# Altium PCB 3043-1-1532.PcbDoc (part 2 of 2)
Units mm, origin at the board's own origin, x right, y up, seen from the top; angles counter-clockwise.
Board outline 82.5 x 82.18 mm, 4 copper layers (Top Layer, Mid-Layer 1, Mid-Layer 2, Bottom Layer); 178 components, 120 nets, 547 pads, 246 vias.
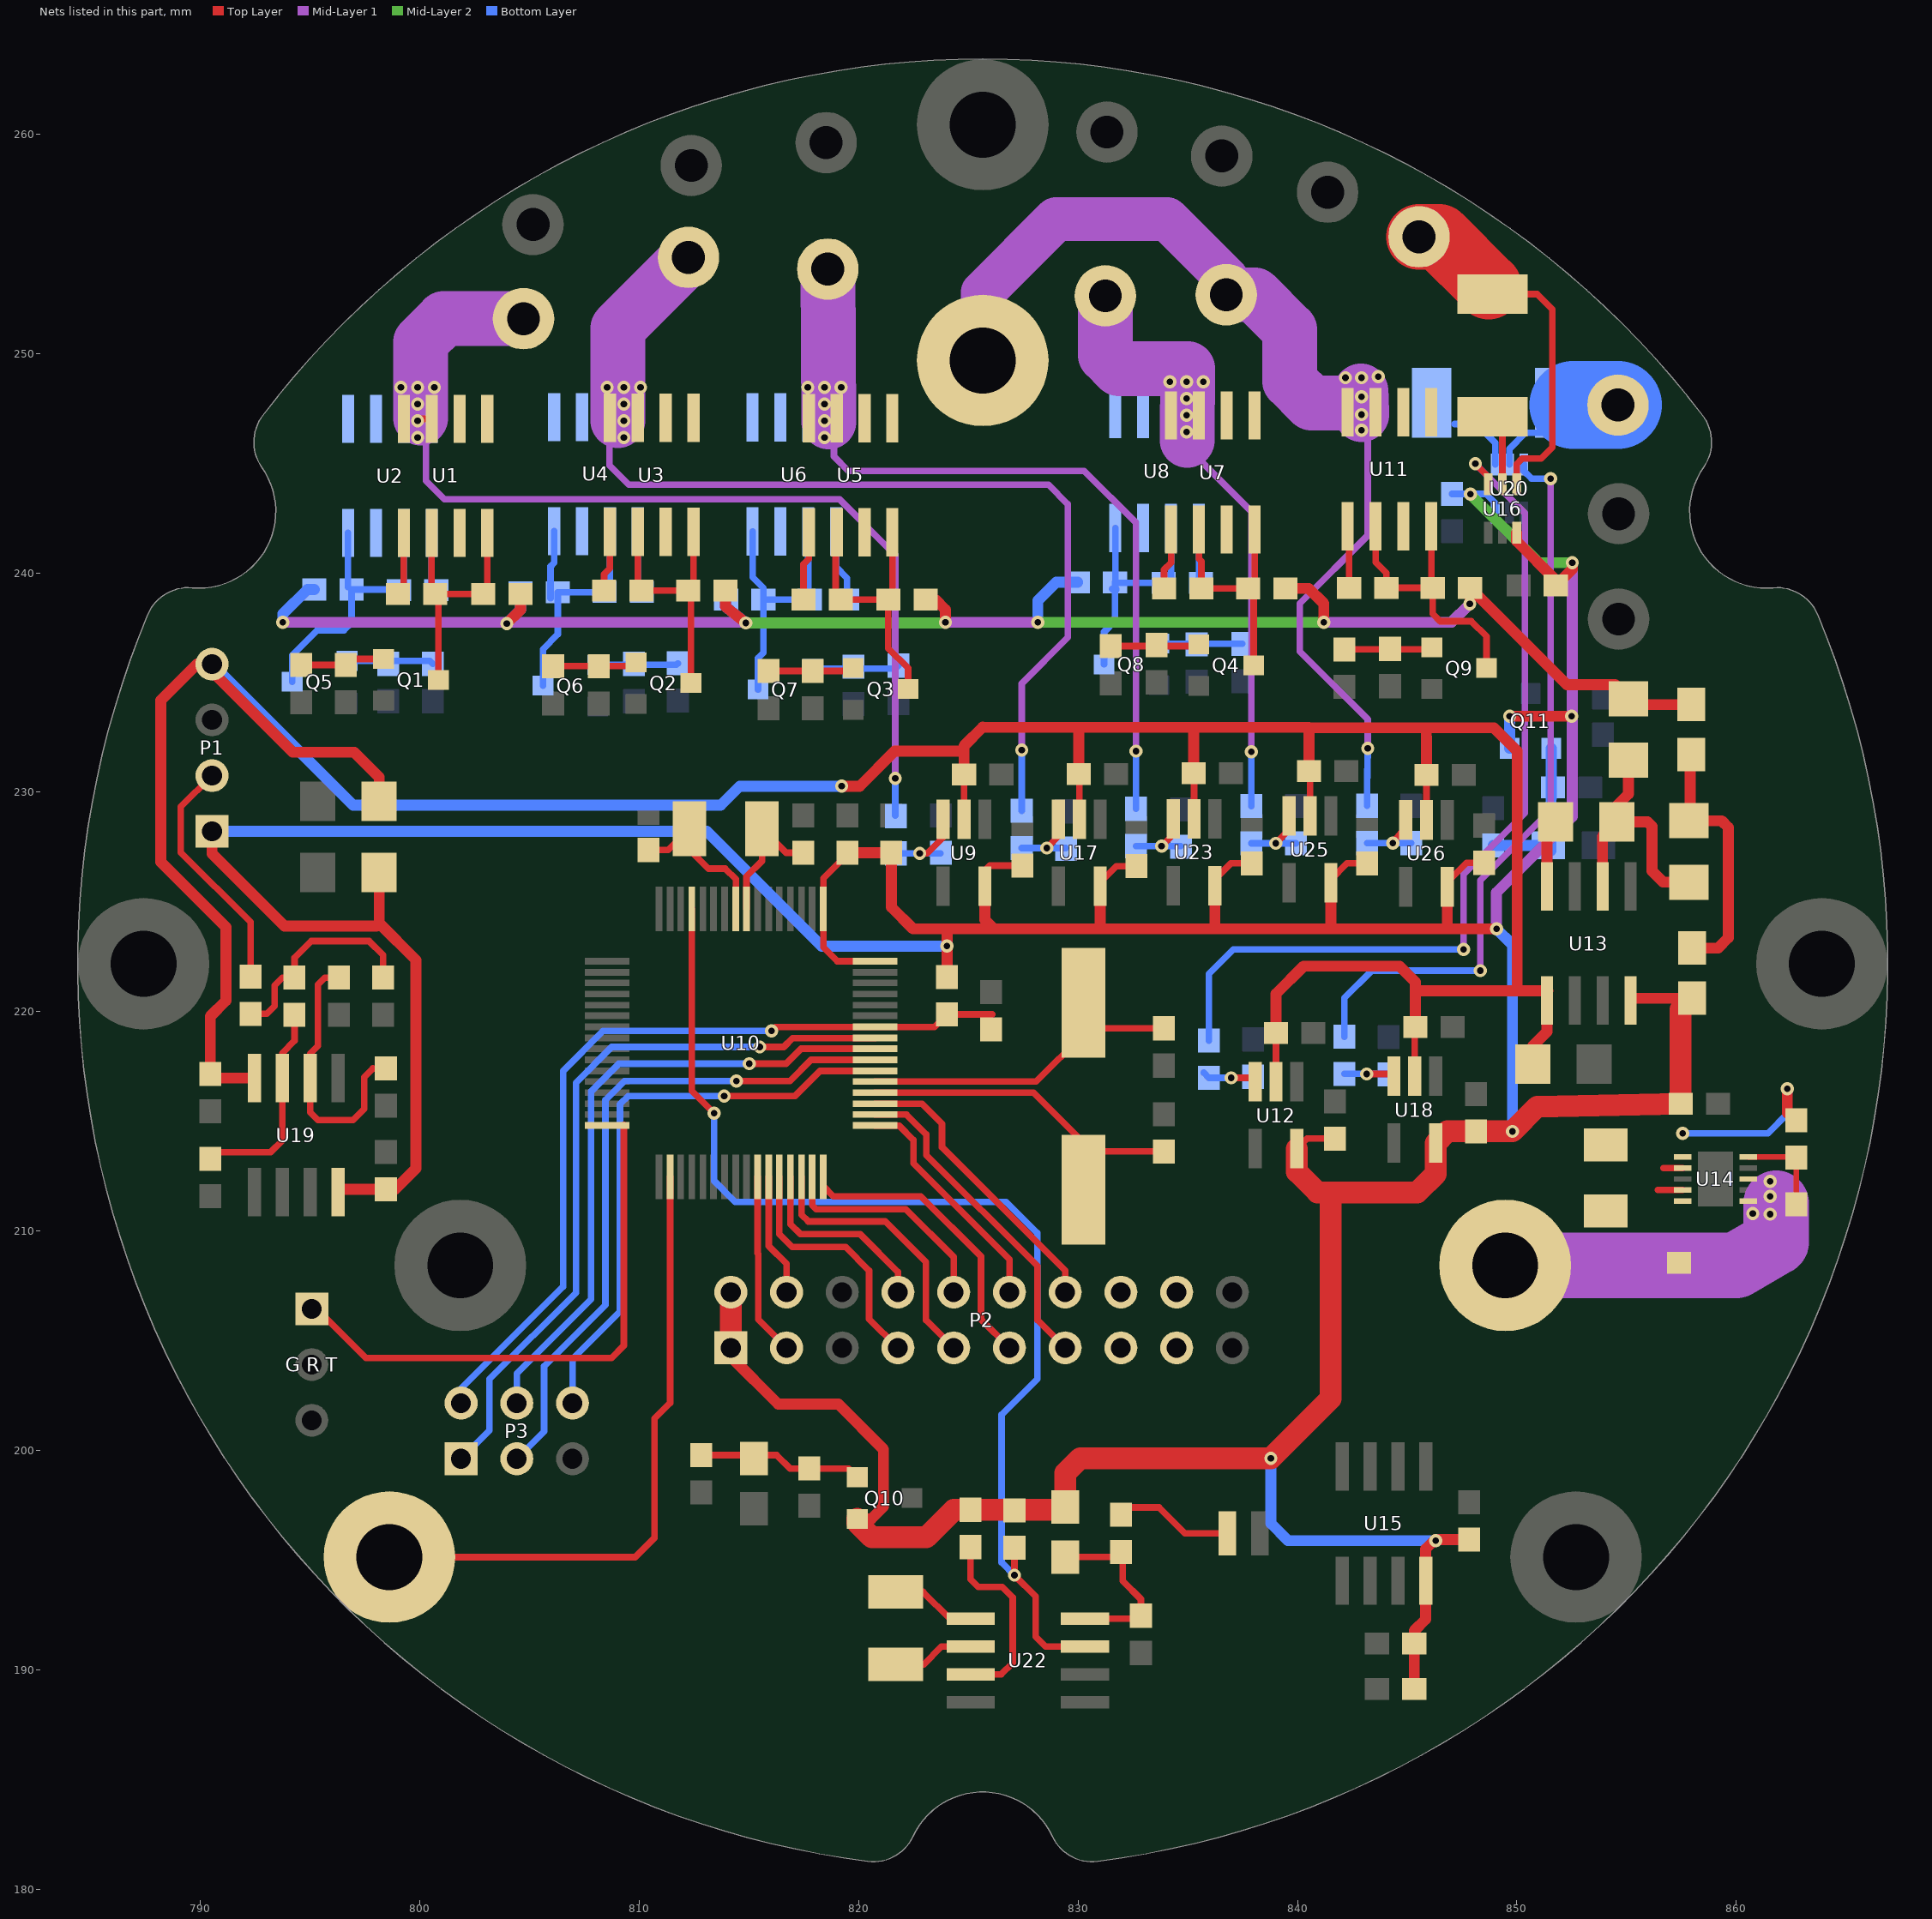
[diagram p4: the nets of this part, all layers, seen from the top]

## Via types
v1: diameter 0.6, hole 0.3, Top Layer to Bottom Layer, 246 vias

## Nets (pads, with @x,y where several pads share a name; then routed paths per layer and width w, separated by ;. In a path a pad name is that pad's centre, name@x,y a point inside that pad or via, vN(x,y) a via of type N, cw(c..) or ccw(c..) an arc to the next point about the centre after c; other vN are vias at no path point) (continued)
MCU_TXD: "G R T.1" U10.32 | length 25.4
  Top Layer w0.3: 795.071,206.451 795.299,206.451 797.535,204.216 808.736,204.216 809.295,204.775 U10.32@809.295,214.833
MCU_TXD2_2: TxD2.1 U10.34 | length 29.2
  Top Layer w0.3: TxD2.1@798.606,195.135 809.815,195.135 810.692,196.012 810.692,201.447 811.403,202.159 U10.34@811.403,212.471
NetBT2_1: BT2.1 R5.2 | length 5.3
  Top Layer w0.3: R5.2@832.033,197.397 833.69,197.397 834.873,196.215 BT2.1@836.795,196.215
NetC3_1: C3.1 U13.4 | length 3.1
  Top Layer w0.5: U13.4@851.367,225.714 851.367,228.051 851.764,228.448 C3.1@851.764,228.651
NetC3_2: C3.2 C23.2 C24.2 U13.2 | length 11.8
  Top Layer w0.5: U13.2@853.907,225.714 853.907,227.994 C3.2@854.564,228.651 ; C24.2@855.091,231.464 855.091,229.921 854.564,229.393 C3.2@854.564,228.651 ; C23.2@857.834,225.902 856.672,225.902 856.158,226.416 856.158,228.448 855.955,228.651 C3.2@854.564,228.651
NetC7_2: C7.2 U10.53 Y2.2 | length 15.4
  Top Layer w0.3: U10.53@820.75,216.814 828.091,216.814 830.25,218.973 Y2.2@830.25,220.396 ; Y2.2@830.314,219.239 C7.2@833.907,219.239
NetC10_2: C10.2 U10.52 Y2.1 | length 16.3
  Top Layer w0.3: U10.52@820.75,216.306 827.964,216.306 830.25,214.02 Y2.1@830.25,211.887 ; Y2.1@830.213,213.628 C10.2@833.907,213.628
NetC13_2: C13.2 U10.9 Y3.2 | length 7.3
  Top Layer w0.3: C13.2@810.412,227.369 811.315,227.369 Y3.2@812.292,228.346 812.292,227.381 813.156,226.517 813.918,226.517 814.4,226.035 U10.9@814.4,224.688
NetC14_2: C14.2 U10.8 Y3.1 | length 6.3
  Top Layer w0.3: U10.8@814.883,224.688 814.883,226.162 815.594,226.873 Y3.1@815.594,228.346 816.698,227.242 C14.2@817.474,227.242
NetC15_1: C15.1 R43.2 R44.1 | length 9.8
  Top Layer w0.3: R43.2@792.277,219.901 793.027,219.901 793.383,220.258 793.383,221.198 793.736,221.551 R44.1@794.283,221.551 794.283,222.453 795.045,223.215 797.687,223.215 798.322,222.58 C15.1@798.322,221.551
NetC16_1: C16.1 R44.2 U19.3 | length 9.6
  Top Layer w0.3: C16.1@790.448,213.296 790.741,213.589 793.191,213.589 793.725,214.122 793.725,218.11 794.283,218.669 R44.2@794.283,219.851
NetC23_1: C23.1 D1.2 D2.1 | length 11.8
  Top Layer w0.5: D2.1@857.899,231.643 857.899,228.766 C23.1@857.834,228.702 859.333,228.702 859.638,228.397 859.638,223.368 859.166,222.896 D1.2@857.981,222.896
NetC27_1: C27.1 D3.2 R5.1 U22.8 | length 8.3
  Top Layer w0.3: D3.2@829.417,195.137 R5.1@832.008,195.137 ; U22.8@830.31,192.329 C27.1@832.802,192.329 ; R5.1@832.033,195.111 832.033,194.051 832.866,193.218 C27.1@832.866,192.264
NetD5_2: D5.2 Q10.1 R47.2 R50.2 | length 7.5
  Top Layer w0.3: R47.2@812.825,199.783 816.268,199.783 816.878,199.173 819.537,199.173 Q10.1@819.932,198.778
NetD6_2: D6.2 Q11.1 R51.1 R52.2 | length 7.2
  Bottom Layer w0.5: R51.1@848.919,227.572 D6.2@851.405,227.572 ; D6.2@851.56,227.33 Q11.1@851.571,231.998
NetL2_1: L2.1 U14.4 | length 1.1
  Top Layer w0.3: 856.429,211.869 U14.4@857.553,211.869
NetL2_2: L2.2 U14.2 | length 0.9
  Top Layer w0.3: 856.674,212.869 U14.2@857.553,212.869
NetP1_2: P1.2 R43.1 | length 11.1
  Top Layer w0.3: P1.2@790.524,230.759 789.102,229.337 789.102,227.254 792.277,224.079 R43.1@792.277,221.601
NetQ1_1: Q1.1 R70.1 R78.1 | length 3.9
  Top Layer w0.3: R70.1@794.588,235.8 R78.1@796.62,235.8 796.898,236.078 Q1.1@798.342,236.078
NetQ2_1: Q2.1 R71.1 R87.1 | length 3.6
  Top Layer w0.3: R71.1@806.069,235.749 Q2.1@809.672,235.749
NetQ3_1: Q3.1 R72.1 R88.1 | length 3.7
  Top Layer w0.3: R72.1@815.899,235.532 Q3.1@819.629,235.532
NetQ4_1: Q4.1 R73.1 R89.1 | length 3.9
  Top Layer w0.3: R73.1@831.494,236.664 Q4.1@835.428,236.664
NetQ5_1: Q5.1 R74.1 R90.1 | length 4
  Bottom Layer w0.3: Q5.1@796.676,235.989 800.444,235.989 R74.1@800.583,235.851
NetQ6_1: Q6.1 R75.1 R91.1 | length 3.7
  Bottom Layer w0.3: Q6.1@808.106,235.811 811.694,235.811 R75.1@811.759,235.876
NetQ7_1: Q7.1 R76.1 R92.1 | length 4
  Bottom Layer w0.3: Q7.1@817.911,235.633 821.676,235.633 R76.1@821.817,235.775
NetQ8_1: Q8.1 R77.1 R93.1 | length 3.8
  Bottom Layer w0.3: Q8.1@833.684,236.776 837.478,236.776 R77.1@837.489,236.765
NetQ9_1: Q9.1 R27.1 R32.1 | length 3.9
  Top Layer w0.3: R27.1@842.137,236.511 Q9.1@846.019,236.511
NetR1_1: R1.1 U1.1 U1.3 | length 2.9
  Top Layer w0.3: R1.1@798.996,239.039 799.262,239.305 U1.1@799.262,241.824
NetR2_2: R2.2 U2.1 U2.3 | length 2.6
  Bottom Layer w0.3: R2.2@800.532,239.268 U2.1@800.532,241.824
NetR3_2: R3.2 U1.5 U1.6 U3.5 U3.6 U5.5 U5.6 U7.5 U7.6 U11.5 U11.6 U16.5 | length 3.4
  Top Layer w0.3: U16.5@849.34,244.033 R3.2@849.34,247.406
NetR4_2: R4.2 U2.5 U2.6 U4.5 U4.6 U6.5 U6.6 U8.5 U8.6 U20.4 | length 3.2
  Bottom Layer w0.3: 847.166,246.786 848.157,246.786 849.016,245.927 U20.4@849.016,244.948
NetR6_2: R6.2 U11.1 U11.3 | length 2.7
  Top Layer w0.3: R6.2@842.354,239.319 U11.1@842.354,242.065
NetR7_2: R7.2 U3.1 U3.3 | length 2.8
  Top Layer w0.3: R7.2@808.394,239.192 808.394,239.942 808.66,240.208 U3.1@808.66,241.875
NetR9_2: R9.2 R25.2 U9.3 | length 4.2
  Top Layer w0.3: v1(822.782,227.217) 823.126,227.217 823.849,227.94 U9.3@823.849,228.764
  Bottom Layer w0.3: R9.2@821.69,227.217 R25.2@823.722,227.217
NetR10_2: R10.2 U4.1 U4.3 | length 2.8
  Bottom Layer w0.3: U4.1@809.93,241.9 809.93,239.331 R10.2@810.119,239.141
NetR11_2: R11.2 U5.1 U5.3 | length 3.2
  Top Layer w0.3: R11.2@817.487,238.785 817.487,240.399 817.728,240.64 U5.1@817.728,241.85
NetR12_2: R12.2 U6.1 U6.3 | length 3.3
  Bottom Layer w0.3: U6.1@818.972,241.891 818.972,240.259 819.467,239.764 R12.2@819.467,238.785
NetR13_2: R13.2 U7.1 U7.3 | length 2.8
  Top Layer w0.3: R13.2@833.921,239.293 833.921,240.145 834.238,240.462 U7.1@834.238,241.977
NetR14_2: R14.2 R15.1 U14.10 | length 4.3
  Top Layer w0.25: U14.10@860.553,213.369 862.712,213.369 R14.2@862.735,213.347 ; R15.1@862.736,211.213 R14.2@862.736,213.345
NetR16_2: R16.2 U8.1 U8.3 | length 2.8
  Bottom Layer w0.3: R16.2@835.508,239.282 U8.1@835.508,242.043
NetR24_2: R24.2 R28.2 U12.3 | length 3.5
  Top Layer w0.3: v1(836.981,216.98) 837.893,216.98 U12.3@838.073,216.8
  Bottom Layer w0.3: R24.2@835.724,217.221 R24.2@835.965,216.98 R28.2@837.921,216.98
NetR29_2: R29.2 R31.2 U17.3 | length 3.5
  Top Layer w0.3: v1(828.573,227.457) 829.107,227.991 U17.3@829.107,228.764
  Bottom Layer w0.3: R29.2@827.43,227.457 R31.2@829.437,227.457
NetR30_2: R30.2 R33.2 U18.3 | length 3.3
  Top Layer w0.3: v1(843.153,217.158) 844.294,217.158 U18.3@844.398,217.054
  Bottom Layer w0.3: R30.2@842.137,217.17 R33.2@844.118,217.158
NetR34_2: R34.2 R37.2 U23.3 | length 3.5
  Top Layer w0.3: v1(833.806,227.547) 834.34,228.081 U23.3@834.34,228.789
  Bottom Layer w0.3: R34.2@832.637,227.547 R37.2@834.669,227.547
NetR40_2: R40.2 R41.2 U25.3 | length 3.5
  Top Layer w0.3: v1(839.013,227.674) 839.623,228.284 U25.3@839.623,228.916
  Bottom Layer w0.3: R40.2@837.895,227.674 R41.2@839.927,227.674
NetR42_2: R42.2 R54.2 U26.3 | length 3.3
  Top Layer w0.3: v1(844.347,227.686) 844.931,228.397 U26.3@844.931,228.738
  Bottom Layer w0.3: R42.2@843.178,227.686 R54.2@845.185,227.686
NetR45_2: R45.2 R46.1 U19.2 | length 12.5
  Top Layer w0.3: R46.1@796.315,221.551 795.667,221.551 795.35,221.234 795.35,218.44 794.995,218.084 794.995,215.417 795.35,215.062 796.95,215.062 797.458,215.57 797.458,217.018 797.851,217.41 R45.2@798.449,217.399
NetR49_2: R49.2 U22.3 | length 8.8
  Top Layer w0.3: R49.2@825.094,195.594 825.094,194.132 825.449,193.777 826.541,193.777 827.024,193.294 827.024,190.322 826.491,189.789 U22.3@825.11,189.789
NetU22_1: U22.1 Y1.2 | length 3.9
  Top Layer w0.3: Y1.2@821.69,193.548 822.935,193.548 824.154,192.329 U22.1@825.11,192.329
NetU22_2: U22.2 Y1.1 | length 3.8
  Top Layer w0.3: Y1.1@821.69,190.246 822.96,190.246 823.773,191.059 U22.2@825.11,191.059
RHYTHM_CS0: P2.7 U10.44 | length 11.5
  Top Layer w0.3: U10.44@816.381,212.471 816.381,209.855 816.966,209.271 819.404,209.271 820.471,208.204 820.471,205.994 P2.7@821.792,204.673
RHYTHM_CS1: P2.8 U10.45 | length 8.9
  Top Layer w0.3: U10.45@816.889,212.471 816.889,210.312 817.347,209.855 820.064,209.855 821.792,208.128 P2.8@821.792,207.213
RHYTHM_CS2: P2.9 U10.46 | length 12.7
  Top Layer w0.3: U10.46@817.397,212.471 817.397,210.744 817.702,210.439 821.207,210.439 823.062,208.585 823.062,205.943 P2.9@824.332,204.673
RHYTHM_CS3: P2.10 U10.47 | length 10.3
  Top Layer w0.3: U10.47@817.88,212.471 817.88,211.176 818.058,210.998 822.147,210.998 824.332,208.813 P2.10@824.332,207.213
RHYTHM_CS4: P2.11 U10.48 | length 13.6
  Top Layer w0.3: U10.48@818.388,212.471 818.388,212.039 818.845,211.582 822.833,211.582 825.576,208.839 825.576,205.969 P2.11@826.872,204.673
RHYTHM_CS5: P2.12 U10.49 | length 10.8
  Top Layer w0.3: U10.49@820.75,214.808 821.842,214.808 822.503,214.147 822.503,213.081 826.872,208.712 P2.12@826.872,207.213
RHYTHM_CS6: P2.13 U10.50 | length 15.1
  Top Layer w0.3: U10.50@820.75,215.316 822.173,215.316 823.087,214.401 823.087,213.462 828.142,208.407 828.142,205.943 P2.13@829.412,204.673
RHYTHM_CS7: P2.14 U10.51 | length 13.4
  Top Layer w0.3: U10.51@820.75,215.798 822.884,215.798 823.798,214.884 823.798,213.817 829.412,208.204 P2.14@829.412,207.213
RST: C8.1 P3.2 R8.1 U10.58 | length 37.7
  Top Layer w0.3: v1(816.026,219.126) 816.204,219.304 823.454,219.304 R8.1@824.027,219.876 826.084,219.876
  Bottom Layer w0.3: P3.2@801.878,202.159 801.878,202.819 806.526,207.467 806.526,217.297 808.355,219.126 v1(816.026,219.126)
S1_1: Q1.3 R1.2 R17.1 U1.2 U1.4 | length 11.9
  Top Layer w0.3: U1.2@800.532,241.824 800.532,239.407 800.848,239.09 Q1.3@800.848,235.134 ; R1.2@800.696,239.039 R17.1@802.882,239.039 803.072,239.229 U1.4@803.072,241.824
S1_2: Q2.3 R7.1 R18.1 U3.2 U3.4 | length 11.8
  Top Layer w0.3: U3.2@809.93,241.875 809.93,239.356 R7.1@810.094,239.192 R18.1@812.229,239.192 812.47,239.432 U3.4@812.47,241.875 ; Q2.3@812.348,234.975 R18.1@812.348,239.073
S1_3: Q3.3 R11.1 R19.1 U5.2 U5.4 | length 13.2
  Top Layer w0.3: U5.2@818.947,242.113 818.947,239.026 R11.1@819.187,238.785 R19.1@821.348,238.785 ; U5.4@821.538,241.85 821.538,238.975 R19.1@821.348,238.785 ; Q3.3@822.254,234.708 822.254,235.656 821.348,236.562 R19.1@821.348,238.785
S1_4: Q4.3 R13.1 R20.1 U7.2 U7.4 | length 11.4
  Top Layer w0.3: U7.2@835.508,242.027 835.508,240.64 835.621,240.526 R13.1@835.621,239.293 R20.1@837.833,239.293 ; Q4.3@838.002,235.788 838.002,239.124 R20.1@837.833,239.293 ; U7.4@838.048,242.027 838.048,239.508 R20.1@837.833,239.293
S1_5: Q9.3 R6.1 R26.1 U11.2 U11.4 | length 13.4
  Top Layer w0.3: U11.2@843.559,242.129 843.559,240.487 844.054,239.993 R6.1@844.054,239.319 R26.1@846.164,239.319 846.164,238.137 846.506,237.795 847.928,237.795 848.619,237.104 Q9.3@848.619,235.661 ; R26.1@846.099,239.383 U11.4@846.099,242.129
S2_1: Q5.3 R2.1 R21.1 U2.2 U2.4 | length 13.3
  Bottom Layer w0.3: Q5.3@794.176,235.039 794.176,236.24 795.325,237.388 796.544,237.388 796.886,237.73 R21.1@796.886,239.243 R2.1@799.021,239.243 ; R21.1@796.722,239.356 U2.4@796.722,241.824 ; R2.1@799.047,239.217 799.262,239.432 U2.2@799.262,241.824
S2_2: Q6.3 R10.1 R22.1 U4.2 U4.4 | length 12.6
  Bottom Layer w0.3: Q6.3@805.606,234.861 805.606,236.519 806.284,237.197 R22.1@806.284,239.116 R10.1@808.394,239.116 ; R22.1@805.956,238.848 805.956,240.298 806.12,240.462 U4.4@806.12,241.9 ; R10.1@808.419,239.141 808.66,239.381 U4.2@808.66,241.9
S2_3: Q7.3 R12.1 R23.1 U6.2 U6.4 | length 12.7
  Bottom Layer w0.3: U6.4@815.162,241.891 815.162,239.801 815.657,239.307 815.657,236.359 815.411,236.113 Q7.3@815.411,234.683 ; R23.1@815.657,238.785 R12.1@817.767,238.785 ; R12.1@817.702,238.85 U6.2@817.702,241.891
S2_4: Q8.3 R16.1 R36.1 U8.2 U8.4 | length 11.9
  Bottom Layer w0.3: Q8.3@831.184,235.826 831.184,237.307 831.684,237.807 R36.1@831.684,239.573 ; R36.1@831.557,239.268 R36.1@831.582,239.243 ; R36.1@831.698,239.307 U8.4@831.698,242.043 ; R36.1@831.709,239.547 R16.1@833.896,239.547 ; R36.1@831.737,239.229 R36.1@831.737,239.268 ; R16.1@833.769,239.243 834.238,239.712 U8.2@834.238,242.043
SIM_CLK: P2.15
SIM_IO: P2.16
SIM_RST: P2.18
SIM_VCC: P2.17
SQW_OUT: R48.2 U10.13 U22.7 | length 51.9
  Top Layer w0.3: U10.13@812.394,224.688 812.394,216.383 v1(813.41,215.367) ; R48.2@827.1,195.568 v1(827.1,194.31) 828.065,193.345 828.065,191.516 828.523,191.059 U22.7@830.31,191.059
  Bottom Layer w0.3: v1(813.41,215.367) 813.41,212.293 814.375,211.328 826.719,211.328 828.142,209.906 828.142,203.251 826.516,201.625 826.516,194.894 v1(827.1,194.31)
SW0: P2.3 U10.42 | length 8.3
  Top Layer w0.3: U10.42@815.391,212.471 815.391,208.991 815.416,208.966 815.416,205.969 P2.3@816.712,204.673
SW1: P2.4 U10.43 | length 5.6
  Top Layer w0.3: U10.43@815.899,212.471 815.899,209.321 816.712,208.509 P2.4@816.712,207.213
TCK: P3.1 U10.57 | length 33.8
  Top Layer w0.3: v1(815.492,218.389) 816.585,218.389 816.991,218.796 U10.57@820.75,218.796
  Bottom Layer w0.3: P3.1@801.878,199.619 803.173,200.914 803.173,203.251 807.11,207.188 807.11,216.764 808.736,218.389 v1(815.492,218.389)
TDI: P3.3 U10.55 | length 31.1
  Top Layer w0.3: v1(814.426,216.84) 816.864,216.84 817.829,217.805 U10.55@820.75,217.805
  Bottom Layer w0.3: P3.3@804.418,199.619 805.663,200.863 805.663,203.835 808.457,206.629 808.457,215.976 809.32,216.84 v1(814.426,216.84)
TDO: P3.6 U10.54 | length 26.8
  Top Layer w0.3: v1(813.867,216.154) 817.093,216.154 818.236,217.297 U10.54@820.75,217.297
  Bottom Layer w0.3: P3.6@806.958,202.159 806.958,204.165 809.117,206.324 809.117,215.773 809.498,216.154 v1(813.867,216.154)
TMS: P3.4 U10.56 | length 29.4
  Top Layer w0.3: v1(815.01,217.627) 816.686,217.627 817.372,218.313 U10.56@820.75,218.313
  Bottom Layer w0.3: P3.4@804.418,202.159 804.418,203.505 807.796,206.883 807.796,216.357 809.066,217.627 v1(815.01,217.627)
V_BT1: B1+.1 R9.1 U1.7 U1.8 U2.7 U2.8 | length 46
  Top Layer w0.3: v1(799.897,246.939) 799.982,247.024 U1.7@800.532,247.024
  Mid-Layer 1 w0.3: 800.278,246.253 800.278,244.196 801.116,243.357 819.125,243.357 821.665,240.817 v1(821.665,230.632)
  Mid-Layer 1 w2.5: v1@800.024,247.066 800.024,250.52 801.091,251.587 B1+.1@804.723,251.587
  Bottom Layer w0.3: R9.1@821.665,228.942 v1(821.665,230.632)
  other v1: 799.897,246.177 799.897,247.701 799.135,248.463 799.897,248.463 800.659,248.463
V_BT2: B2+.1 R29.1 U3.7 U3.8 U4.7 U4.8 | length 46.6
  Mid-Layer 1 w0.3: 808.634,246.228 808.634,244.907 809.523,244.018 828.65,244.018 829.539,243.129 829.539,237.058 827.43,234.95 v1(827.43,231.927)
  Mid-Layer 1 w2.5: v1@809.015,246.939 809.015,251.155 B2+.1@812.241,254.381
  Bottom Layer w0.3: R29.1@827.43,229.157 v1(827.43,231.927)
  other v1: 809.295,246.177 809.295,246.939 809.295,247.701 808.533,248.463 809.295,248.463 810.057,248.463
V_BT3: B3+.1 R34.1 U5.7 U5.8 U6.7 U6.8 | length 35.7
  Mid-Layer 1 w0.3: 818.871,245.923 818.871,245.313 819.531,244.653 830.275,244.653 832.637,242.291 v1(832.637,231.877)
  Mid-Layer 1 w2.5: B3+.1@818.591,253.848 v1@818.642,246.888
  Bottom Layer w0.3: R34.1@832.637,229.247 v1@832.637,231.902
  other v1: 818.439,246.177 818.439,246.939 818.439,247.701 817.677,248.463 818.439,248.463 819.201,248.463
V_BT4: B4+.1 R40.1 U7.7 U7.8 U8.7 U8.8 | length 27.2
  Mid-Layer 1 w0.3: 835.177,245.516 837.895,242.799 v1(837.895,231.851)
  Mid-Layer 1 w2.5: B4+.1@831.24,252.628 831.24,249.936 831.875,249.301 835,249.301 834.974,246.05
  Bottom Layer w0.3: R40.1@837.895,229.374 v1(837.895,231.851)
  other v1: 834.949,246.431 834.949,247.193 834.949,247.955 834.187,248.717 834.949,248.717 835.711,248.717
V_BT5: B5+.1 R42.1 U11.7 U11.8 V_IN.1 | length 47.5
  Mid-Layer 1 w0.3: 843.153,246.177 843.204,246.126 843.204,241.706 840.105,238.608 840.105,236.423 843.204,233.324 v1(843.204,232.004)
  Mid-Layer 1 w2: V_IN.1@825.653,249.681 825.653,252.782 829.005,256.134 834.06,256.134 836.752,253.441 B5+.1@836.752,252.679
  Mid-Layer 1 w2.5: B5+.1@836.752,252.679 838.048,252.679 839.648,251.079 839.648,248.742 840.638,247.752 v1@842.899,247.752 ; v1@842.899,248.285 842.905,248.031 v1(842.924,247.218)
  Bottom Layer w0.3: R42.1@843.178,229.386 843.178,230.175 v1(843.204,232.004)
  other v1: 842.924,246.507 842.924,248.031 842.188,248.895 842.924,248.895 843.686,248.945
V_CURR_CHG: R24.1 U16.6 | length 40.5
  Top Layer w0.3: v1(848.106,244.983) 848.69,244.399 U16.6@848.69,244.033
  Mid-Layer 1 w0.3: v1(847.573,222.834) 847.573,226.263 850.367,229.057 850.367,242.722 v1(848.106,244.983)
  Bottom Layer w0.3: R24.1@835.965,218.68 835.965,221.717 837.082,222.834 v1(847.573,222.834)
V_CURR_DISCHG: R30.1 U20.6 | length 33.9
  Mid-Layer 1 w0.3: v1(848.335,221.869) 848.335,225.984 851.535,229.184 v1(851.535,244.297)
  Bottom Layer w0.3: R30.1@842.137,218.858 842.137,220.624 843.382,221.869 v1(848.335,221.869) ; U20.6@850.316,244.948 850.316,244.653 850.671,244.297 v1(851.535,244.297)
VCC_2V8: C1.2 C2.2 C9.1 C11.1 C12.1 C17.1 C18.1 C20.1 C22.1 C25.1 C29.1 C30.1 C33.1 C37.1 C39.1 D1.1 D3.1 P1.1 P2.1 P2.2 Q10.2 Q11.2 R8.2 R14.1 R38.2 R48.1 R49.1 R67.2 U9.5 U10.1 U10.64 U12.5 U13.8 U14.1 U15.8 U16.3 U17.5 U18.5 U19.8 U20.3 U23.5 U25.5 U26.5 | length 280.2
  Top Layer w0.3: C11.1@819.48,227.242 819.48,227.178 818.388,226.085 818.388,222.936 819.023,222.301 U10.64@820.75,222.301 ; U9.5@825.749,225.716 825.749,226.436 825.971,226.658 C18.1@827.456,226.658 ; U17.5@831.007,225.716 831.007,225.903 831.737,226.632 C29.1@832.663,226.632 ; U23.5@836.24,225.741 836.24,226.03 836.969,226.759 C33.1@837.921,226.759 ; U12.5@839.973,213.752 840.433,214.212 C25.1@841.705,214.212 ; U25.5@841.523,225.868 841.523,226.03 842.252,226.759 C37.1@843.178,226.759 ; U26.5@846.831,225.69 846.831,225.903 847.713,226.785 C39.1@848.512,226.785
  Top Layer w0.5: P1.1@790.524,228.219 790.524,227.203 793.826,223.901 798.017,223.901 798.144,224.028 ; U19.8@796.265,211.776 796.265,211.836 796.329,211.9 798.869,211.9 799.821,212.852 799.821,222.352 798.144,224.028 ; C17.1@798.144,226.339 798.144,224.028 ; P2.1@814.172,204.673 814.172,204.267 816.331,202.108 819.074,202.108 821.131,200.05 821.131,197.434 820.575,196.878 Q10.2@819.932,196.878 ; C11.1@819.48,227.242 C12.1@821.487,227.242 821.487,224.765 822.477,223.774 v1(849.071,223.774) ; R8.2@824.027,221.576 824.027,223.698 ; U9.5@825.749,225.716 825.749,224.185 826.16,223.774 ; 831.007,223.829 U17.5@831.007,225.716 ; 836.24,223.804 U23.5@836.24,225.741 ; 841.523,223.795 U25.5@841.523,225.868 ; R67.2@845.324,189.128 845.324,191.782 845.845,192.303 845.845,195.504 846.281,195.94 C9.1@847.827,195.94 ; U18.5@846.298,214.006 U18.5@846.298,214.117 ; 846.831,223.906 U26.5@846.831,225.69 ; v1(849.671,233.467) v1(852.49,233.467) ; U16.3@849.99,241.833 849.99,241.448 C1.2@851.775,239.663 ; C1.2@851.775,239.42 852.526,240.171 v1(852.526,240.462) ; U13.8@855.274,220.61 D1.1@857.981,220.61 ; R14.1@862.329,215.377 v1(862.329,216.486)
  Top Layer w1: P2.1@814.172,204.673 P2.2@814.172,207.213 ; Q10.2@819.932,196.878 819.932,196.703 820.598,196.037 823.087,196.037 824.343,197.294 D3.1@829.288,197.294 ; D3.1@829.417,197.423 829.417,198.963 830.097,199.644 838.798,199.644 841.516,202.362 841.516,211.645 ; U12.5@839.973,213.752 839.973,212.704 840.918,211.76 845.464,211.76 846.298,212.593 U18.5@846.298,214.006 846.834,214.542 v1(849.796,214.542) 850.925,215.671 C22.1@857.467,215.798 857.467,220.096 D1.1@857.981,220.61
  Mid-Layer 1 w0.5: v1(849.071,223.774) 849.071,225.425 852.526,228.879 v1(852.526,240.462)
  Mid-Layer 2 w0.5: v1(847.877,243.586) 851.002,240.462 v1(852.526,240.462)
  Bottom Layer w0.3: C2.2@847.039,243.598 848.602,243.598 849.016,243.184 U20.3@849.016,242.748 ; v1(857.555,214.452) 861.441,214.452 862.329,215.34 v1(862.329,216.486)
  Bottom Layer w0.5: P1.1@790.524,228.219 813.079,228.219 818.312,222.987 v1(824.027,222.987) ; v1(838.784,199.644) 838.784,196.672 839.572,195.885 v1(846.303,195.885) ; v1(849.071,223.774) 849.796,223.049 v1(849.796,214.542) ; Q11.2@849.671,231.998 v1(849.671,233.467)
VCC_5V: C24.1 D2.2 R17.2 R18.2 R19.2 R20.2 R21.2 R22.2 R23.2 R26.2 R36.2 | length 85.3
  Top Layer w0.5: v1(803.961,237.693) 804.582,238.315 R17.2@804.582,239.039 ; R18.2@813.929,239.192 813.929,238.469 v1(814.857,237.719) ; R19.2@823.048,238.785 823.493,238.785 823.951,238.328 v1(823.951,237.744) ; R20.2@839.456,239.293 840.511,239.293 841.197,238.608 v1(841.197,237.744) ; v1@847.864,238.594 R26.2@847.864,239.319 852.283,234.899 854.481,234.899 855.384,233.996 D2.2@857.956,233.996
  Mid-Layer 1 w0.5: v1(793.75,237.744) v1@814.832,237.744 ; v1(823.951,237.744) v1(828.167,237.744) ; v1(841.197,237.744) 847.014,237.744 v1(847.852,238.582)
  Mid-Layer 2 w0.5: v1(814.857,237.719) v1@823.925,237.719 ; v1(828.167,237.744) v1(841.197,237.744) ; 847.014,237.744 v1(847.852,238.582)
  Bottom Layer w0.5: v1(793.75,237.744) 793.75,238.125 794.868,239.243 R21.2@795.186,239.243 ; v1(803.961,237.693) 804.584,238.316 R22.2@804.584,239.116 ; R23.2@813.957,238.785 813.957,238.442 v1(814.857,237.719) ; v1(828.167,237.744) 828.167,238.735 829.005,239.573 R36.2@829.984,239.573
VCC_-2V8: C4.1 C19.1 C21.1 C26.1 C28.1 C31.1 C32.1 C35.1 C38.1 C40.1 P1.4 U9.2 U12.2 U13.5 U17.2 U18.2 U19.4 U23.2 U25.2 U26.2 | length 154
  Top Layer w0.3: U9.2@824.799,228.764 C26.1@824.799,230.897 ; U17.2@830.057,228.764 C31.1@830.057,230.813 ; U23.2@835.29,228.789 C35.1@835.29,230.838 ; U12.2@839.023,216.8 C28.1@839.023,219.021 ; U25.2@840.573,228.916 C38.1@840.573,230.914 ; U18.2@845.348,217.054 C32.1@845.348,219.275 ; U26.2@845.881,228.738 C40.1@845.881,230.781
  Top Layer w0.5: U19.4@792.455,216.976 790.628,216.976 C19.1@790.448,217.156 790.448,219.786 791.159,220.497 791.159,223.85 788.187,226.822 788.187,234.188 789.838,235.839 P1.4@790.524,235.839 790.524,235.509 794.207,231.826 797.001,231.826 798.144,230.683 C21.1@798.144,229.591 ; v1(819.226,230.276) 820.039,230.276 821.639,231.877 824.802,231.877 ; C26.1@824.802,230.81 824.802,232.119 825.652,232.969 840.525,232.95 845.871,232.943 ; C31.1@830.035,230.835 830.035,232.881 ; C35.1@835.267,230.861 835.267,232.906 ; C28.1@839.026,219.024 839.026,220.816 840.283,222.072 844.652,222.072 845.376,221.347 C32.1@845.376,219.304 ; C38.1@840.525,230.962 840.525,232.955 ; 845.376,220.955 U13.5@851.408,220.955 ; C40.1@845.884,230.784 845.875,232.207 845.871,232.943 ; 850.011,220.98 850.011,231.877 848.944,232.943 845.871,232.943 ; C4.1@850.722,217.602 850.722,218.44 851.367,219.085 U13.5@851.367,220.514
  Bottom Layer w0.5: P1.4@790.524,235.839 796.95,229.413 813.714,229.413 814.578,230.276 v1(819.226,230.276)
VCC_BAT: R4.1 U20.5 V.1 | length 4.9
  Bottom Layer w0.3: U20.5@849.666,244.948 849.666,245.654 850.392,246.38 R4.1@851.484,246.38
  Bottom Layer w4: R4.1@852.576,247.65 V.1@854.608,247.65
VCC_CHARGE: R3.1 S+.1 U16.4 | length 16.3
  Top Layer w0.3: R3.1@848.893,252.711 850.919,252.711 851.611,252.019 851.611,245.72 851.103,245.212 850.24,245.212 849.99,244.962 U16.4@849.99,244.033
  Top Layer w3: S+.1@845.541,255.321 846.455,255.321 R3.1@848.716,253.06
VCC_MNG: C5.1 U14.5 U14.6 U14.8 VMNG.1 | length 14.4
  Mid-Layer 1 w3: VMNG.1@849.469,208.432 859.992,208.432 861.822,209.499 861.822,211.252
  other v1: 861.543,210.769 860.755,210.795 861.543,211.582 861.543,212.268
pads on no net: U10.7 U10.10 U10.11 U10.12 U10.15 U10.16 U10.26 U10.27 U10.28 U10.29 U10.30 U10.31 U10.38 U13.7 U19.5 U19.6 U19.7

## Polygon pours and split planes (outlines as drawn)
VCC_MNG on Top Layer (solid, remove dead copper): 860.219,212.612 860.219,210.591 860.474,210.376 861.844,210.376 861.844,212.558 860.219,212.558
VCC_2V8 on Top Layer (solid, remove dead copper): 857.91,213.284 857.91,218.567 855.243,218.567 855.243,215.392 857.301,213.335 857.885,213.335
GND on Top Layer (solid, remove dead copper): 858.368,205.765 858.368,218.77 861.365,218.77 861.365,213.995 859.968,213.995 859.79,213.817 859.79,210.337 860.095,210.033 862.863,210.033 862.863,207.62 861.035,205.791 858.342,205.791
VCC_MNG on Top Layer (solid, remove dead copper): 851.789,209.474 855.142,209.474 857.098,211.43 857.86,211.43 857.86,205.689 851.586,205.689 851.586,209.525 852.856,209.525
NetL2_2 on Top Layer (solid, remove dead copper): 852.449,212.674 856.996,212.674 857.123,212.801 857.123,212.928 855.396,214.655 852.5,214.655 852.5,212.674
NetL2_1 on Top Layer (solid, remove dead copper): 852.348,212.293 856.818,212.293 857.148,211.963 857.148,211.785 856.945,211.785 856.844,211.684 855.37,210.21 852.449,210.21 852.449,212.293
V_BT1 on Top Layer (solid, remove dead copper): 798.964,245.948 800.913,245.948 800.913,248.971 798.855,248.971 798.855,245.948
V_BT2 on Top Layer (solid, remove dead copper): 808.362,245.948 810.311,245.948 810.311,248.971 808.253,248.971 808.253,245.948
V_BT3 on Top Layer (solid, remove dead copper): 817.506,245.948 819.455,245.948 819.455,248.971 817.397,248.971 817.397,245.948
V_BT4 on Top Layer (solid, remove dead copper): 834.016,246.202 835.965,246.202 835.965,249.225 833.907,249.225 833.907,246.202
NetR1_1 on Top Layer (solid, remove dead copper): 798.928,240.843 802.437,240.843 802.437,245.415 798.119,245.415 798.119,240.843
NetR7_2 on Top Layer (solid, remove dead copper): 808.12,240.843 811.835,240.843 811.835,245.415 807.263,245.415 807.263,240.843
NetR11_2 on Top Layer (solid, remove dead copper): 817.264,240.843 820.979,240.843 820.979,245.415 816.407,245.415 816.407,240.843
NetR13_2 on Top Layer (solid, remove dead copper): 833.774,241.097 837.489,241.097 837.489,245.669 832.917,245.669 832.917,241.097
V_BT5 on Top Layer (solid, remove dead copper): 842.042,246.253 843.991,246.253 843.991,249.276 841.934,249.276 841.934,246.253
NetR6_2 on Top Layer (solid, remove dead copper): 841.623,240.944 845.337,240.944 845.337,245.516 840.765,245.516 840.765,240.944
NetR3_2 on Top Layer (solid, remove dead copper): 801.522,245.974 821.639,245.974 822.909,244.704 831.85,244.704 831.85,246.253 846.48,246.253 846.48,246.507 850.519,246.507 850.519,249.428 846.48,249.428 846.48,252.298 846.455,252.298 846.455,252.349 846.125,252.349 846.125,252.298 801.522,252.298
GND on Top Layer (solid, remove dead copper): 782.422,264.49 868.172,264.49 868.172,179.553 782.904,179.553 782.904,264.82
GND on Mid-Layer 2 (solid, remove dead copper): 782.853,264.363 868.147,264.363 868.147,180.467 783.031,180.467 783.031,264.541
V_BT1 on Bottom Layer (solid, remove dead copper): 798.964,245.948 800.913,245.948 800.913,248.971 798.855,248.971 798.855,245.948
V_BT2 on Bottom Layer (solid, remove dead copper): 808.362,245.948 810.311,245.948 810.311,248.971 808.253,248.971 808.253,245.948
V_BT3 on Bottom Layer (solid, remove dead copper): 817.506,245.948 819.455,245.948 819.455,248.971 817.397,248.971 817.397,245.948
V_BT4 on Bottom Layer (solid, remove dead copper): 834.016,246.202 835.965,246.202 835.965,249.225 833.907,249.225 833.907,246.202
NetR2_2 on Bottom Layer (solid, remove dead copper): 798.42,240.589 801.929,240.589 801.929,245.161 797.611,245.161 797.611,240.589
NetR10_2 on Bottom Layer (solid, remove dead copper): 807.818,240.843 811.327,240.843 811.327,245.415 807.009,245.415 807.009,240.843
NetR12_2 on Bottom Layer (solid, remove dead copper): 816.708,240.843 820.217,240.843 820.217,245.415 815.899,245.415 815.899,240.843
NetR16_2 on Bottom Layer (solid, remove dead copper): 833.218,240.843 836.727,240.843 836.727,245.415 832.409,245.415 832.409,240.843
NetR4_2 on Bottom Layer (solid, remove dead copper): 794.893,245.974 821.004,245.974 821.004,242.951 830.885,242.951 830.885,246.151 848.36,246.151 848.36,252.755 794.817,252.755 794.817,245.923
GND on Bottom Layer (solid, remove dead copper): 782.676,264.363 868.324,264.363 868.324,180.289 783.209,180.289 783.209,264.541

## Keep-outs
Keep-Out Layer:
  the board outline again, w0.127

## Silkscreen, mask and mechanical layers (free items; w line width, h text height)
Top Overlay:
  rectangle: 803.529,188.493 819.709,191.907
  text "PN:3043-1-1532" at 803.656,194.691 h1
  text "Rev:3.00" at 803.605,192.837 h1
  text "SN:" at 801.065,190.398 h1
Mechanical 1:
  circle w0.127: c801.837,208.432 r1.5
  circle w0.127: c837.028,204.679 r0.5
  circle w0.127: c834.488,204.679 r0.5
  circle w0.127: c816.708,204.679 r0.5
  circle w0.127: c819.248,204.679 r0.5
  circle w0.127: c821.788,204.679 r0.5
  circle w0.127: c824.328,204.679 r0.5
  circle w0.127: c826.868,204.679 r0.5
  circle w0.127: c829.408,204.679 r0.5
  circle w0.127: c831.948,204.679 r0.5
  circle w0.127: c831.948,207.219 r0.5
  circle w0.127: c829.408,207.219 r0.5
  circle w0.127: c826.868,207.219 r0.5
  circle w0.127: c824.328,207.219 r0.5
  circle w0.127: c821.788,207.219 r0.5
  circle w0.127: c819.248,207.219 r0.5
  circle w0.127: c816.708,207.219 r0.5
  circle w0.127: c814.168,204.679 r0.5
  circle w0.127: c814.168,207.219 r0.5
  circle w0.127: c834.488,207.219 r0.5
  circle w0.127: c837.028,207.219 r0.5
  circle w0.127: c849.469,208.431 r1.5
  circle w0.127: c825.653,249.681 r1.5
  circle w0.127: c787.403,222.181 r3
  circle w0.127: c863.903,222.181 r3
  circle w0.127: c852.7,195.135 r3
  circle w0.127: c798.606,195.135 r3
  circle w0.127: c825.653,260.431 r3
  circle w0.127: c825.653,249.681 r3
  circle w0.127: c801.837,208.432 r3
  circle w0.127: c849.469,208.432 r3
  lines w0.127: 812.898,203.409 812.898,208.439 838.298,208.439 838.298,203.409 812.898,203.409

## Text inside footprints (layer, text, board x,y; h text height)
P2: Top Overlay "2" at 811.632,206.705 h1.27; Top Overlay "1" at 811.632,204.165 h1.27; Top Overlay "19" at 838.556,204.165 h1.27; Top Overlay "20" at 838.556,206.705 h1.27
P3: Top Overlay "1" at 799.846,199.111 h1.27; Top Overlay "2" at 799.338,201.651 h1.27; Top Overlay "5" at 808.482,199.111 h1.27; Top Overlay "6" at 808.482,201.651 h1.27